# Altium PCB 主控.PcbDoc
Units mm, origin at the board's own origin, x right, y up, seen from the top; angles counter-clockwise.
Board outline 95.27 x 80.77 mm, 4 copper layers (Top Layer, GND, PWR, Bottom Layer), stack 0.603 mm thick; 23 components, 70 nets, 268 pads, 8 vias.
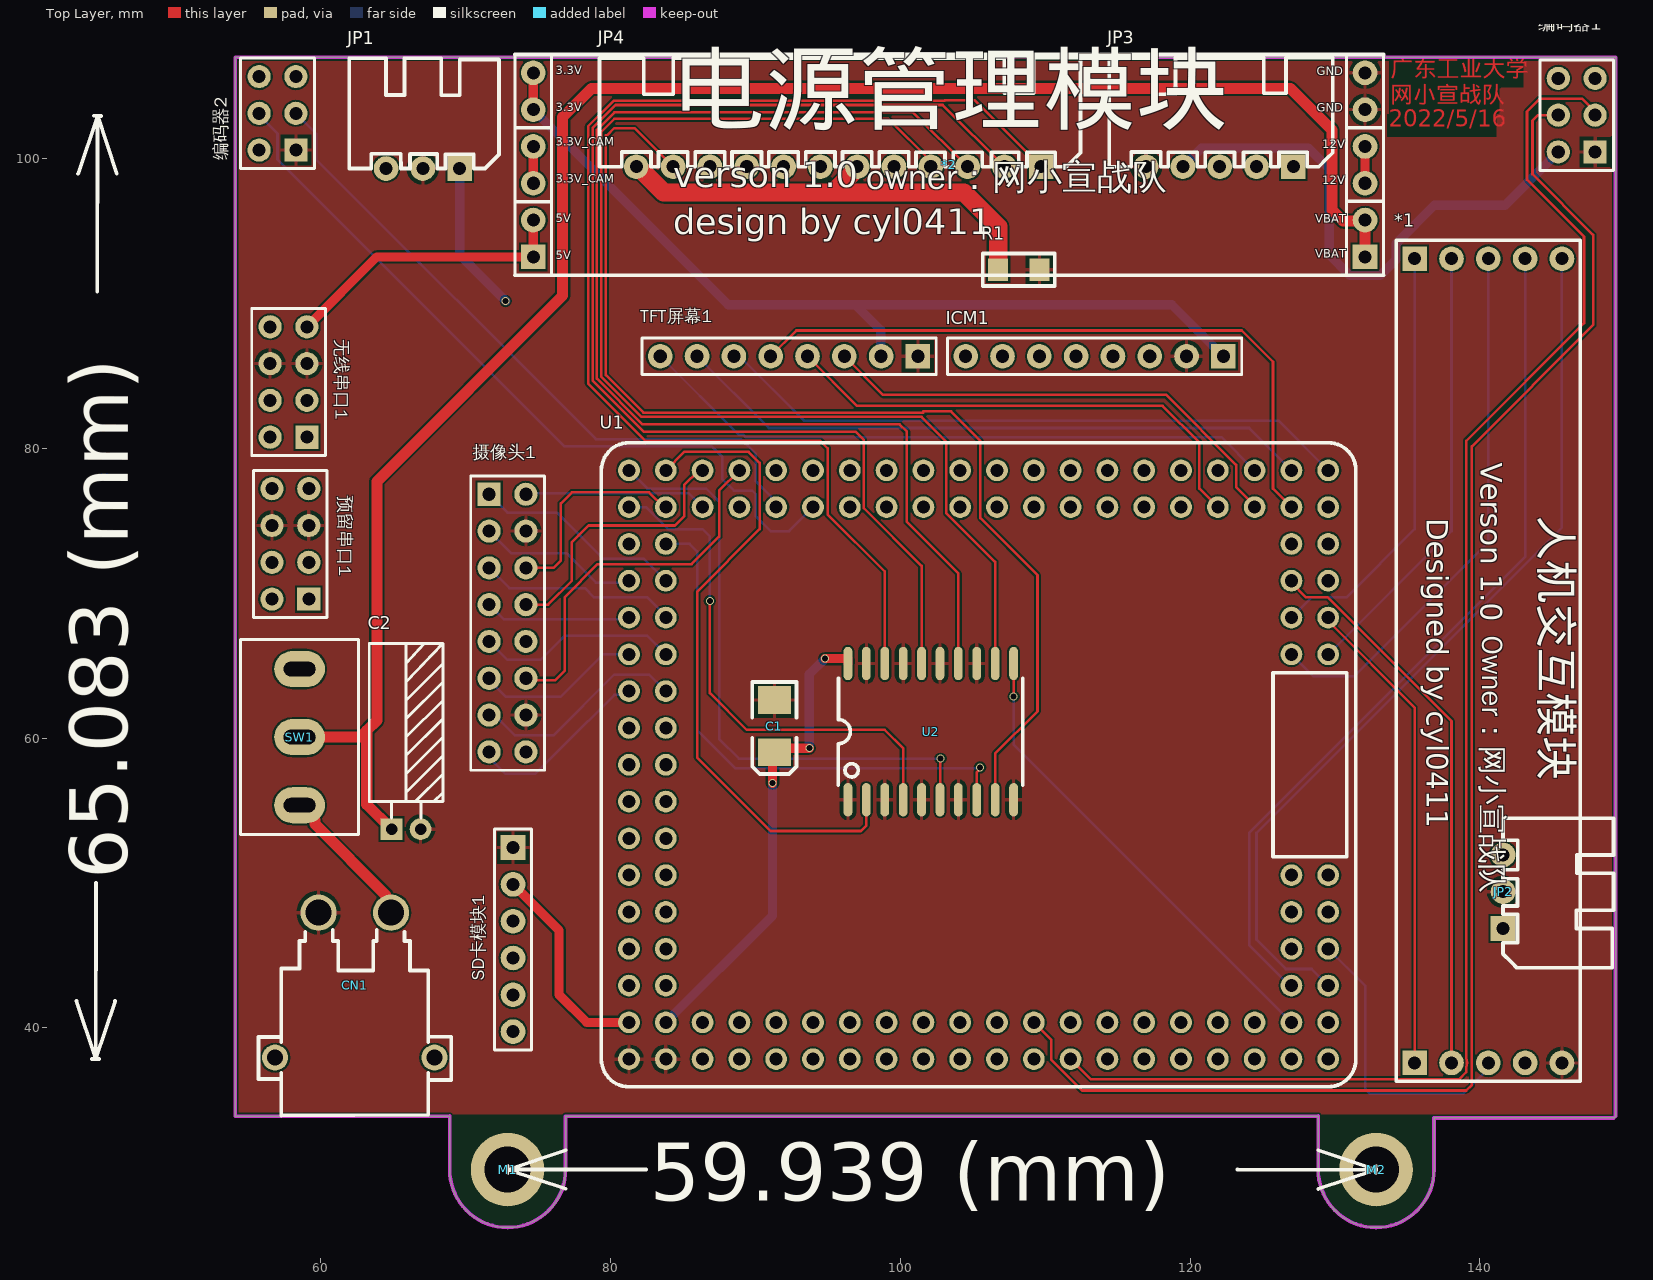
[diagram p0: Top Layer view]
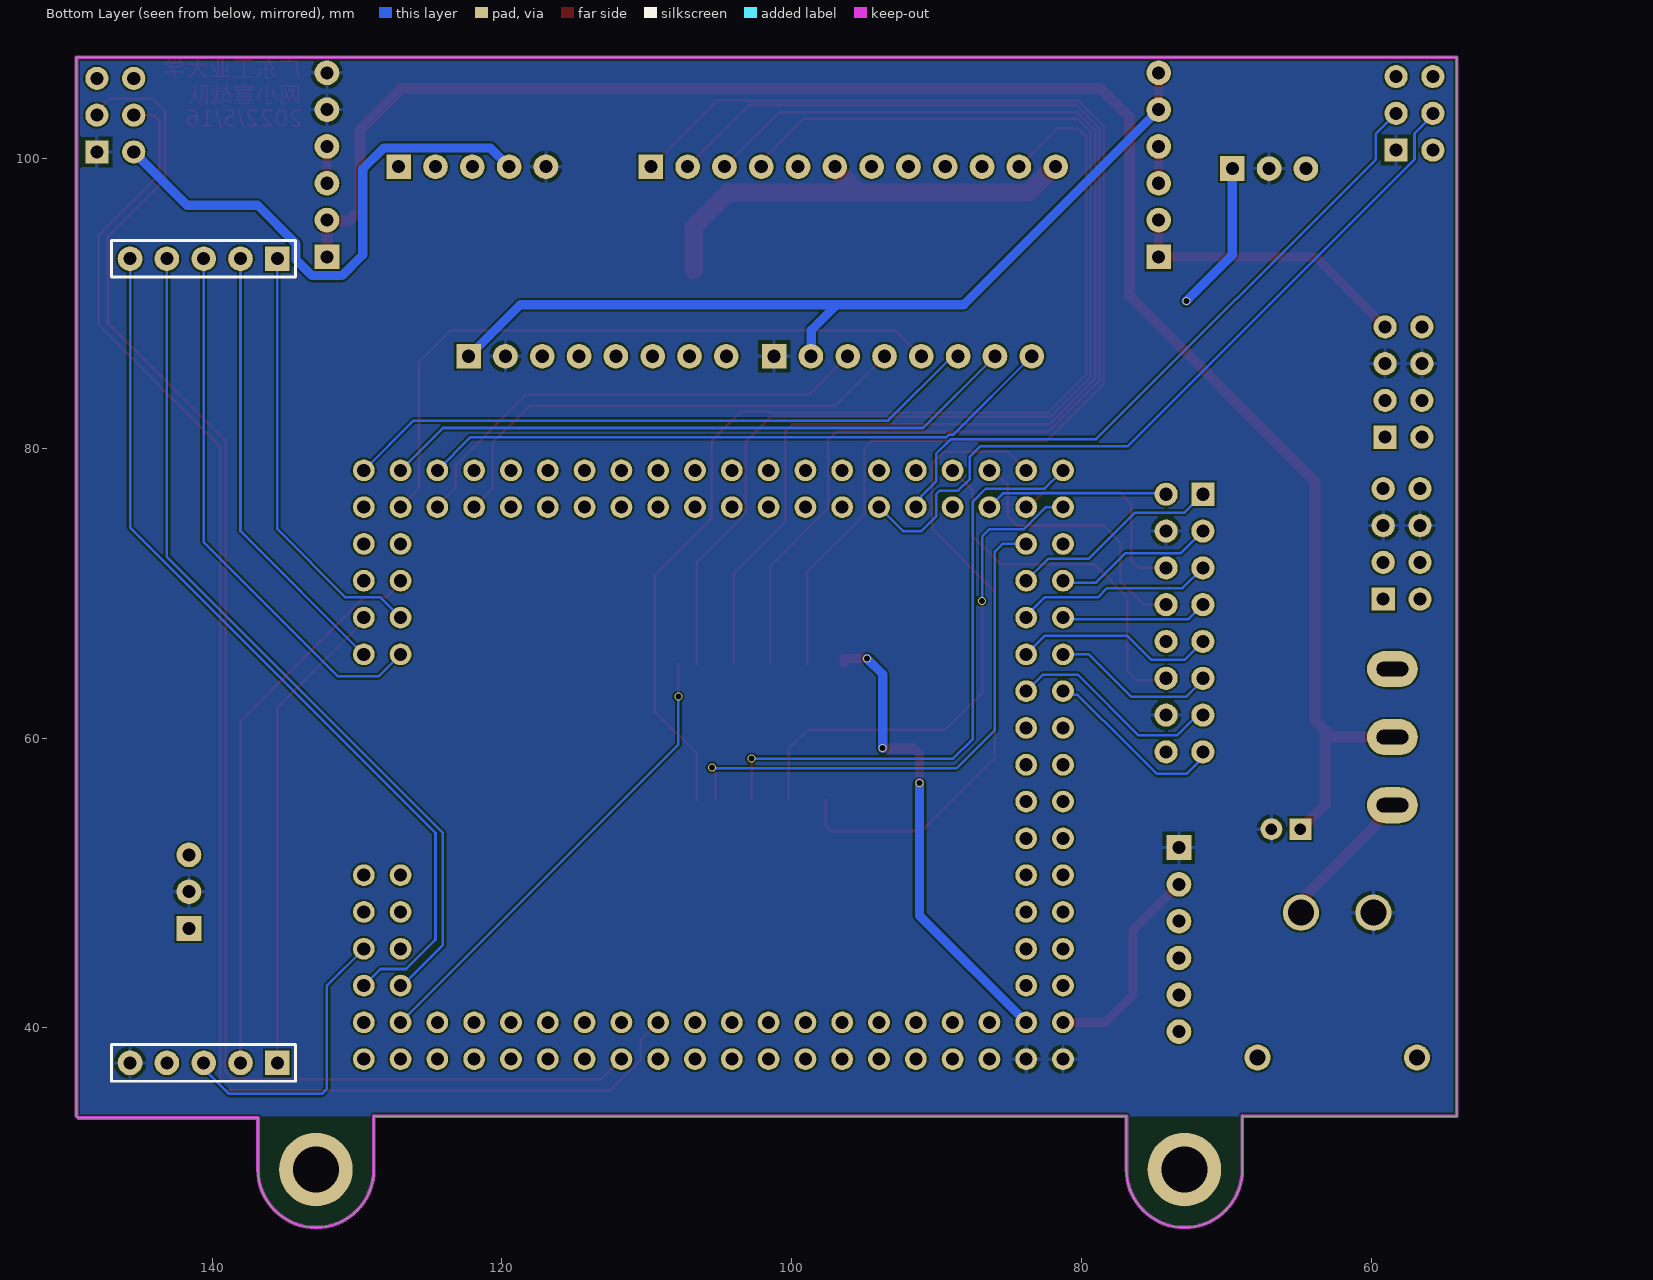
[diagram p1: Bottom Layer view, seen from below]
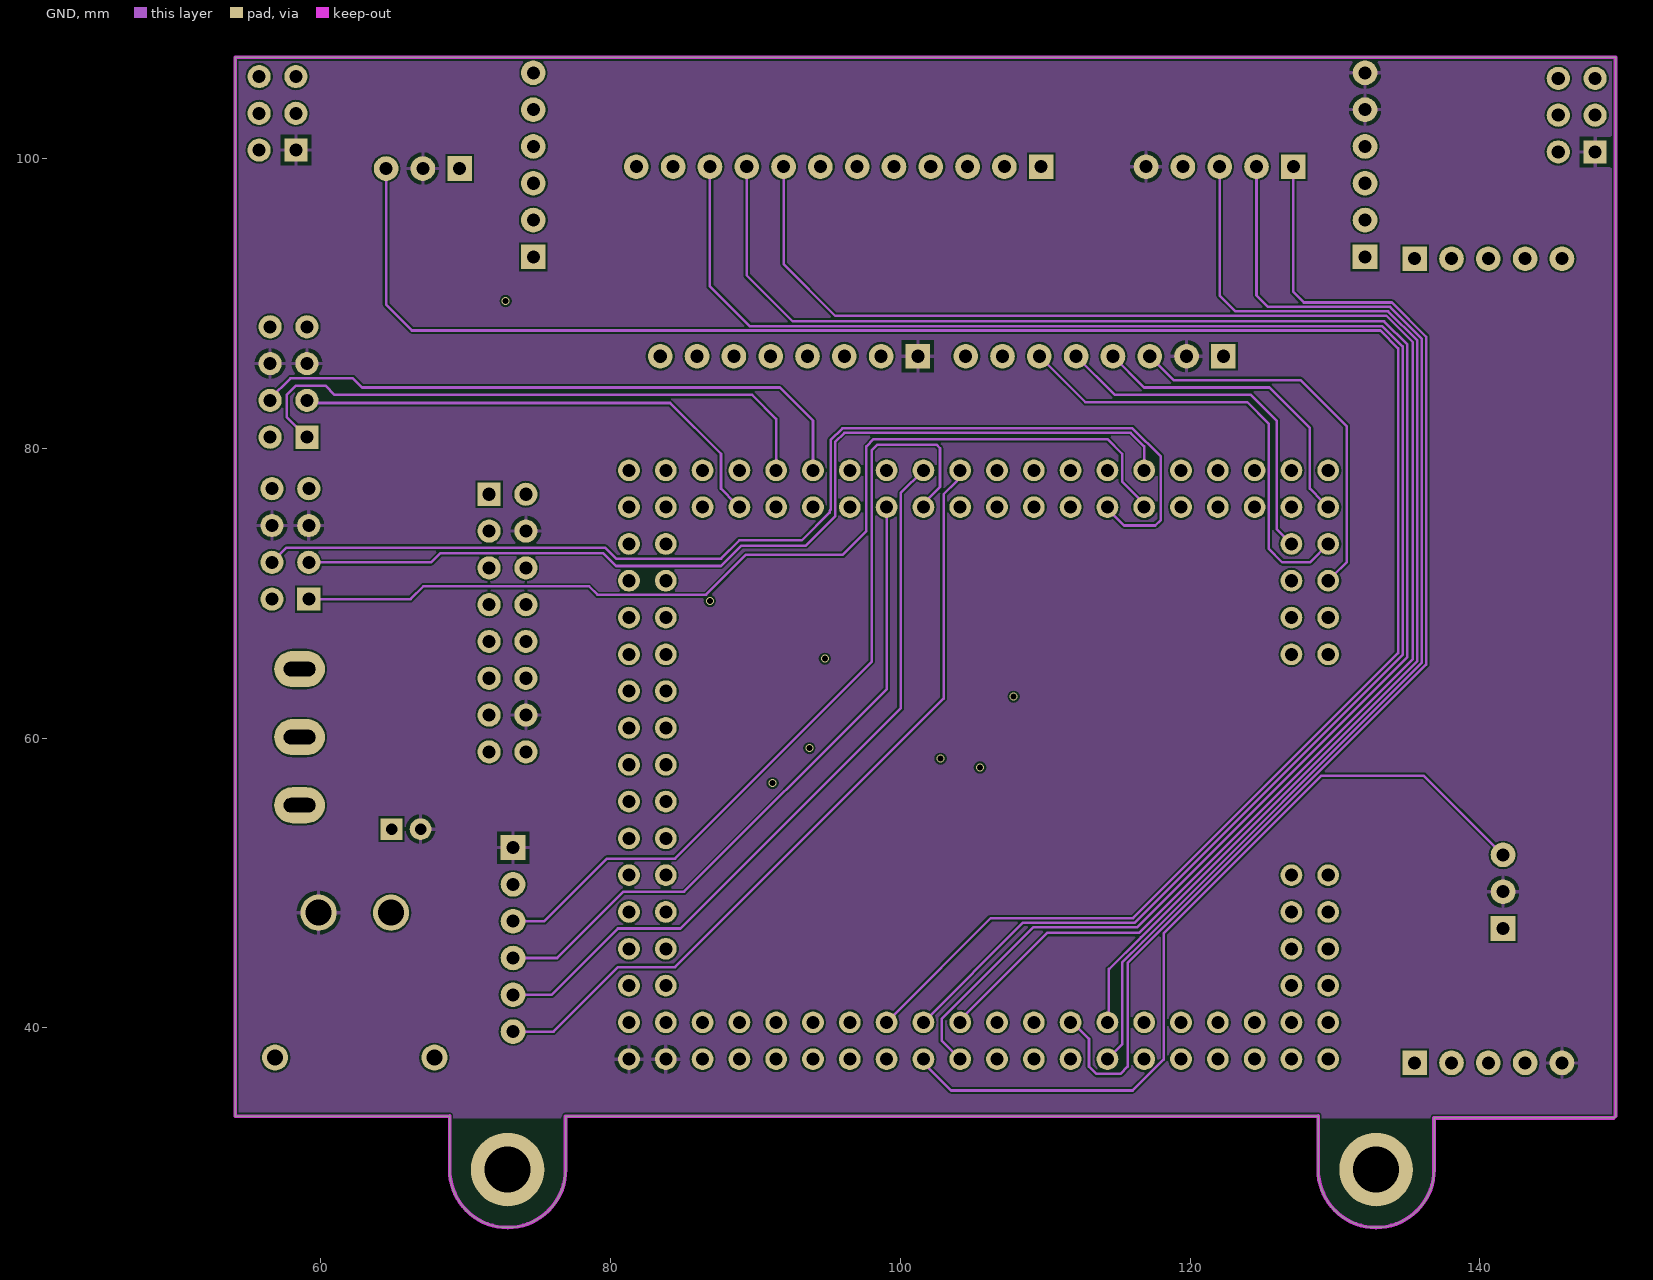
[diagram p2: GND]
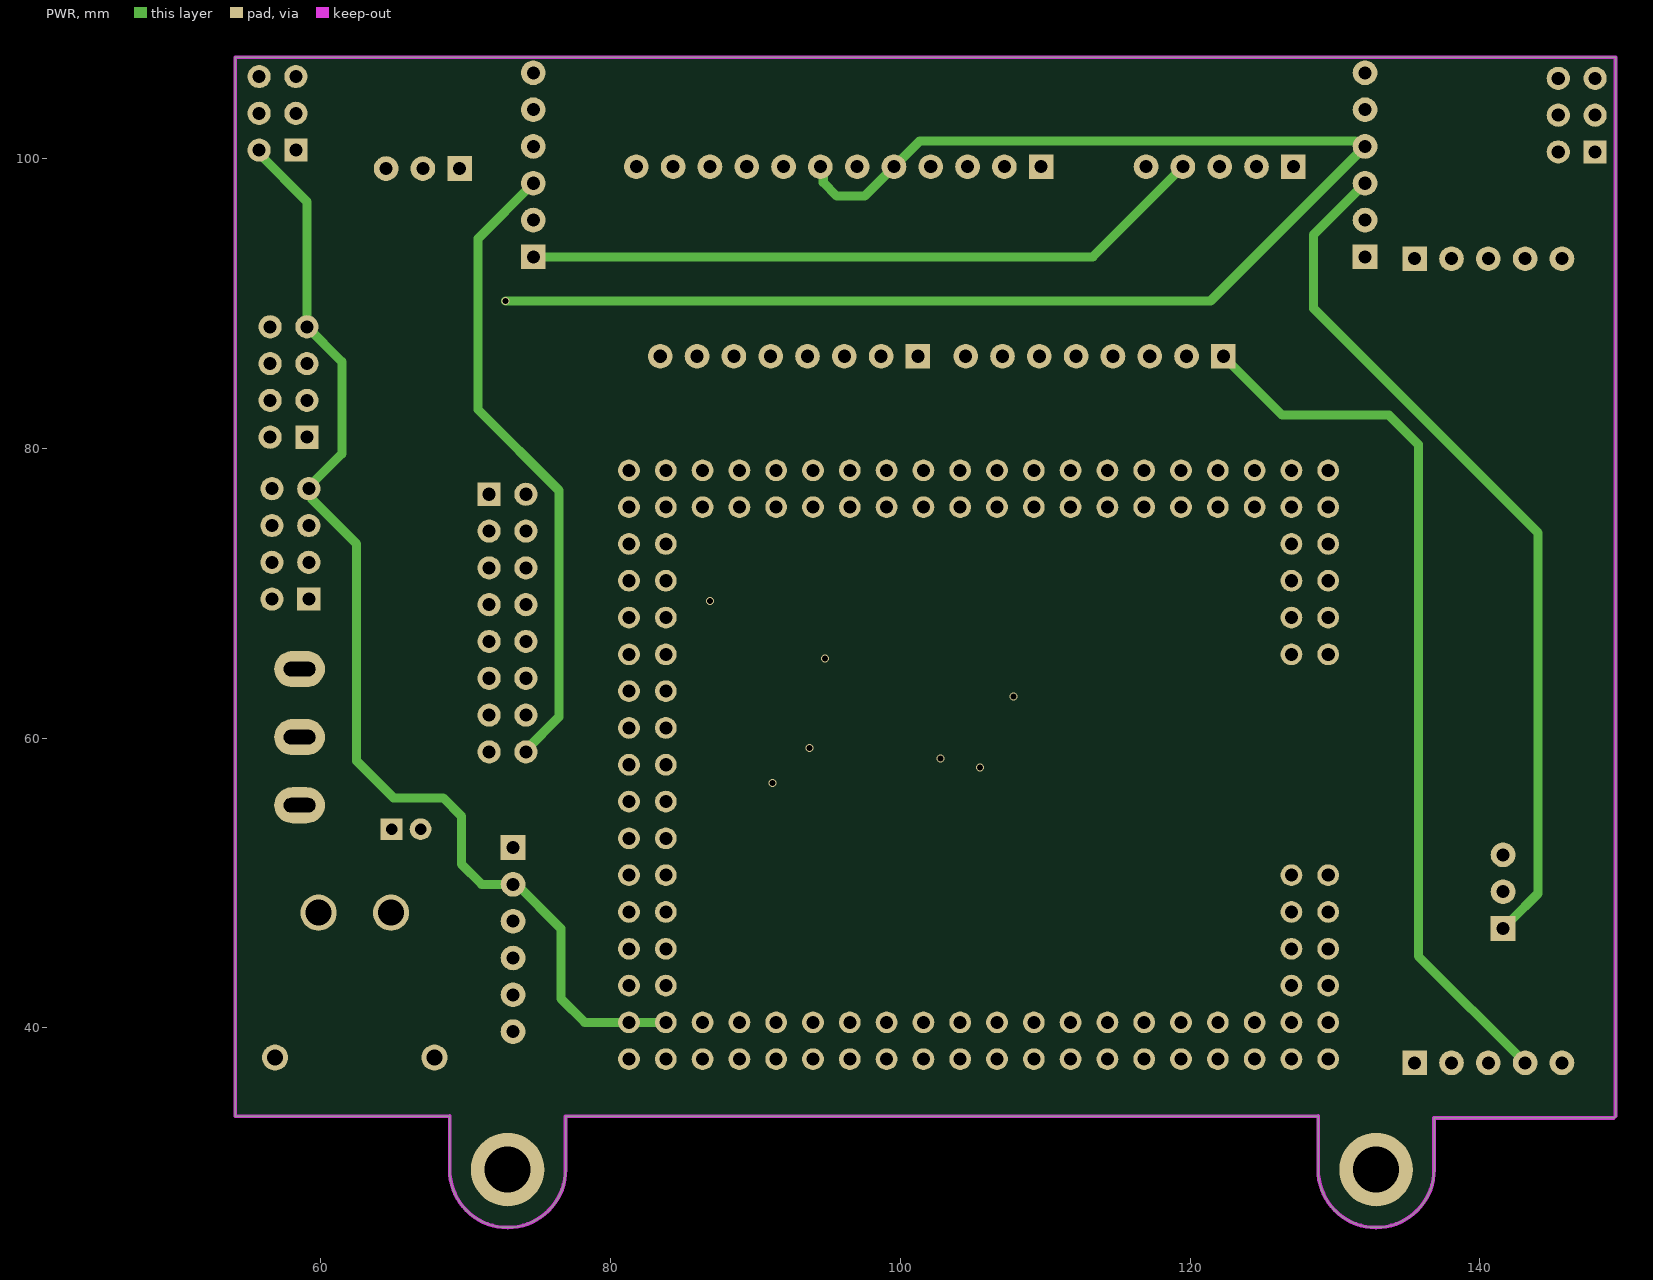
[diagram p3: PWR]

## Layer stack, top to bottom
Top Solder: solder mask 0.0102, Solder Resist, Dk 3.5
Top Layer: signal copper 0.0356
Dielectric 2: prepreg 0.0711, PP-006, Dk 4.1
GND: signal copper 0.035
Dielectric 1: dielectric 0.32, FR-4, Dk 4.8
PWR: signal copper 0.035
Dielectric 3: prepreg 0.0711, PP-006, Dk 4.1
Bottom Layer: signal copper 0.0356
Bottom Solder: solder mask 0.0102, Solder Resist, Dk 3.5

## Board outline
54.102,33.909 54.102,34.303 54.102,106.992 149.369,106.992 149.369,33.909 149.252,33.792 136.842,33.792 136.842,30.226 cw(c132.842,30.226) 128.842,30.226 128.842,33.909 76.903,33.909 76.903,30.227 cw(c72.903,30.227) 68.903,30.227 68.903,33.922 68.89,33.909

## Design rules (kind name [scope] priority, off if disabled: settings)
Clearance [All] p1: gap=0.127 ignorepadtopadclearanceinfootprint=TRUE
ComponentClearance [All] p1: gap=0.254 collisioncheckmode=3 verticalgap=2540 showdistances=FALSE donotcheckwithout3dbody=TRUE
Height [All] p1: minheight=0 maxheight=999 prefheight=12.7
PolygonConnect [All] p1: connectstyle=Relief reliefconductorwidth=0.254 reliefentries=4 polygonreliefangle="90 Angle" airgapwidth=0.254
RoutingVias [All] p1: holewidth=4 width=4 viastyle="Through Hole" minholewidth=0.45 minwidth=0.5 maxholewidth=0.711 maxwidth=1.27
SilkToSilkClearance [All] p1: silktosilkclearance=0
SilkToSolderMaskClearance [IsPad] p1: minsilkscreentomaskgap=0 clearancetoexposedcopper=FALSE
SolderMaskExpansion [All] p1: expansion=0.102 istentingtop=FALSE
UnRoutedNet [All] p1: checkbadconnections=TRUE
Width [InNetClass('SIGNAL')] p1: maxlimit=5 minlimit=0.127 preferedwidth=0.178
25 further rules are at their usual default settings.

## Classes and differential pairs
component class 主控: U1

## Components (designator, comment, footprint, x,y, rotation, side; value= is the part's Value field where it differs from the comment)
*1 "人机交互模块" PCBComponent_1#1 141.097,66.421 r270 top
*2 "电源管理模块" PCBComponent_1#2 113.665,99.949 r0 top
C1 "C-CD" "CD B(3528)" 91.313,60.833 r90 top value=10uF
C2 "C-CAP" "CAP 2.0*5*11-H - GD" 65.897,53.721 r0 top value=100uF
CN1 "XT30PW-M" CONN-TH_XT30PW-M 62.357,41.529 r0 top
ICM1 "HDR-1X8" HDR2.54-M-LI-8P 113.411,86.36 r180 top
JP1 "HDR-1X3" XH2.54-WI-3P 67.056,99.314 r180 top
JP2 "HDR-1X3" XH2.54-WI-3P 141.605,49.403 r90 top
JP3 "HDR-1X5" XH2.54-WI-5P 122.047,99.441 r180 top
JP4 "HDR-1X12" XH2.54-WI-12P 95.758,99.441 r180 top
M1 "M3" "M3 125X200" 72.903,30.227 r0 top
M2 "M3" "M3 125X200" 132.842,30.226 r0 top
R1 "R" "R 1206_L" 108.204,92.329 r180 top value=0
SD卡模块1 "HDR-1X6" HDR2.54-M-LI-6P 73.279,46.101 r270 top
SW1 "MTS-10x" MTS-10x 58.547,60.072 r270 top
TFT屏幕1 "HDR-1X8" HDR2.54-M-LI-8P 92.329,86.36 r180 top
U1 "TC364_CoreBoard" TC364_CoreBoard 81.28,37.846 r90 top locked
U2 "SN74HC244DWRG4" SOIC-20_L12.8-W7.5-P1.27-LS10.3-BL 102.089,60.451 r0 top
摄像头1 "Header 8X2" HDR2.54-LI-2x8P 72.898,67.945 r270 top
无线串口1 "Header 4X2" HDR2.54-LI-2x4P 57.785,84.582 r90 top
编码器1 "Header3X2" HDR2.54-LI-2x3P 146.685,102.997 r90 top
编码器2 "Header3X2" HDR2.54-LI-2x3P 57.023,103.124 r90 top
预留串口1 "Header 4X2" HDR2.54-LI-2x4P 57.912,73.406 r90 top

## Footprints (in the part's own frame and the unit in brackets; to place one, negate y for a bottom-side part, rotate by r counter-clockwise, add the part's x,y. Pads: shape width x height; smd on the part's side, far side on the other; paste and mask are expansions set on the pad)
"CAP 2.0*5*11-H - GD" [mm] "脚距2mm直径5mm高度11mm"
  rect 1.5x1.5 hole 0.8: 1(-1,0)
  round 1.5 hole 0.8: 2(1,0)
  silkscreen extent -2.54,0.76 2.55,12.83, body extent -2.5,-0.25 2.51,12.96, height 5.02
"CD B(3528)" [mil] "长3.5mm，宽2.8mm，厚1.9mm"
  rect 75x90 smd: 1(-70.87,-0.01) 2(70.86,-0.01)
  silkscreen extent -130,-60 120,60, body extent -69,-55 69,55, height 75
CONN-TH_XT30PW-M [mm]
  round 2.5 hole 1.8: 1(-2.5,6.427) 2(2.5,6.427)
  round 1.8 hole 1.1: 3(5.5,-3.574) 4(-5.5,-3.574)
  silkscreen extent -6.65,-7.57 6.65,5.24
HDR2.54-LI-2x3P [mm] "双排排针，3x2脚"
  rect 1.6x1.6 hole 0.9: 1(-2.54,-1.27)
  round 1.6 hole 0.9: 2(-2.54,1.27) 3(0,-1.27) 4(0,1.27) 5(2.54,-1.27) 6(2.54,1.27)
  silkscreen extent -3.81,-2.54 3.81,2.54, body extent -3.81,-2.54 3.81,2.54, height 8.5
HDR2.54-LI-2x4P [mm] "双排排针，4x2脚"
  rect 1.6x1.6 hole 0.9: 1(-3.81,-1.27)
  round 1.6 hole 0.9: 2(-3.81,1.27) 3(-1.27,-1.27) 4(-1.27,1.27) 5(1.27,-1.27) 6(1.27,1.27) 7(3.81,-1.27) 8(3.81,1.27)
  silkscreen extent -5.08,-2.54 5.08,2.54, body extent -5.08,-2.54 5.08,2.54, height 8.5
HDR2.54-LI-2x8P [mm] "双排排针，8x2脚"
  rect 1.6x1.6 hole 0.9: 1(-8.89,-1.27)
  round 1.6 hole 0.9: 2(-8.89,1.27) 3(-6.35,-1.27) 4(-6.35,1.27) 5(-3.81,-1.27) 6(-3.81,1.27) 7(-1.27,-1.27) 8(-1.27,1.27) 9(1.27,-1.27) 10(1.27,1.27) 11(3.81,-1.27) 12(3.81,1.27) 13(6.35,-1.27) 14(6.35,1.27) 15(8.89,-1.27) 16(8.89,1.27)
  silkscreen extent -10.16,-2.54 10.16,2.54, body extent -10.16,-2.54 10.16,2.54, height 8.5
HDR2.54-M-LI-6P [mm] "排母，6脚"
  rect 1.7x1.7 hole 0.9: 1(-6.35,0)
  round 1.7 hole 0.9: 2(-3.81,0) 3(-1.27,0) 4(1.27,0) 5(3.81,0) 6(6.35,0)
  silkscreen extent -7.62,-1.27 7.62,1.27, body extent -7.62,-1.27 7.62,1.27, height 8.5
HDR2.54-M-LI-8P [mm] "排母，8脚"
  rect 1.7x1.7 hole 0.9: 1(-8.89,0)
  round 1.7 hole 0.9: 2(-6.35,0) 3(-3.81,0) 4(-1.27,0) 5(1.27,0) 6(3.81,0) 7(6.35,0) 8(8.89,0)
  silkscreen extent -10.16,-1.27 10.16,1.27, body extent -10.16,-1.27 10.16,1.27, height 8.5
"M3 125X200" [mm] "M3螺丝孔，孔125Mil，焊盘200Mil"
  round 5.08 hole 3.175: 1(0,0)
MTS-10x [mm] "MTS10系列3脚扭子开关"
  oval 2.5x3.5 hole 1 slot 2.2 at 90 deg unplated: 1(-4.7,0) 2(0,0) 3(4.7,0)
  silkscreen extent -6.73,-4.06 6.73,4.06, body extent -6.6,-3.95 6.6,3.95, height 30.47
PCBComponent_1#1 [mm]
  rect 1.7x1.7 hole 0.9: 1(-26.67,-5.588) 6(28.829,-5.588)
  round 1.7 hole 0.9: 2(-26.67,-3.048) 3(-26.67,-0.508) 4(-26.67,2.032) 5(-26.67,4.572) 7(28.829,-3.048) 8(28.829,-0.508) 9(28.829,2.032) 10(28.829,4.572)
  silkscreen extent -27.94,-6.86 30.1,5.84, body extent -27.94,-6.86 30.1,5.84, height 8.5
PCBComponent_1#2 [mm]
  round 1.7 hole 0.9: 1(-38.989,3.429) 1(-38.989,5.969) 2(-38.989,-1.651) 2(-38.989,0.889) 3(-38.989,-4.191) 4(18.415,-4.191) 5(18.415,-1.651) 5(18.415,0.889) 6(18.415,3.429) 6(18.415,5.969)
  rect 1.7x1.7 hole 0.9: 3(-38.989,-6.731) 4(18.415,-6.731)
  silkscreen extent -40.26,-8 19.68,7.24, body extent -40.26,-8 19.68,7.24, height 8.5
"R 1206_L" [mil] "1/4W贴片电阻"
  rect 55x62 smd: 1(-55.12,0) 2(57.09,0)
  silkscreen extent -96,-44 98,44, body extent -63,-31 63,32, height 22
SOIC-20_L12.8-W7.5-P1.27-LS10.3-BL [mm]
  oval 0.6x2.3 smd: 1(-5.696,-4.7) 2(-4.426,-4.7) 3(-3.156,-4.7) 4(-1.886,-4.7) 5(-0.616,-4.7) 6(0.654,-4.7) 7(1.924,-4.7) 8(3.194,-4.7) 9(4.464,-4.7) 10(5.734,-4.7) 11(5.734,4.7) 12(4.464,4.7) 13(3.194,4.7) 14(1.924,4.7) 15(0.654,4.7) 16(-0.616,4.7) 17(-1.886,4.7) 18(-3.156,4.7) 19(-4.426,4.7) 20(-5.696,4.7)
  silkscreen extent -6.37,-3.68 6.37,3.68
TC364_CoreBoard [mm] "逐飞科技TC364核心板"
  round 1.5 hole 0.9: 1(0,0) 2(2.54,0) 3(0,-2.54) 4(2.54,-2.54) 5(0,-5.08) 6(2.54,-5.08) 7(0,-7.62) 8(2.54,-7.62) 9(0,-10.16) 10(2.54,-10.16) 11(0,-12.7) 12(2.54,-12.7) 13(0,-15.24) 14(2.54,-15.24) 15(0,-17.78) 16(2.54,-17.78) 17(0,-20.32) 18(2.54,-20.32) 19(0,-22.86) 20(2.54,-22.86) 21(0,-25.4) 22(2.54,-25.4) 23(0,-27.94) 24(2.54,-27.94) 25(0,-30.48) 26(2.54,-30.48) 27(0,-33.02) 28(2.54,-33.02) 29(0,-35.56) 30(2.54,-35.56) 31(0,-38.1) 32(2.54,-38.1) 33(0,-40.64) 34(2.54,-40.64) 35(0,-43.18) 36(2.54,-43.18) 37(0,-45.72) 38(2.54,-45.72) 39(0,-48.26) 40(2.54,-48.26) 41(5.08,-48.26) 42(5.08,-45.72) 43(7.62,-48.26) 44(7.62,-45.72) 45(10.16,-48.26) 46(10.16,-45.72) 47(12.7,-48.26) 48(12.7,-45.72) 49(27.94,-45.72) 50(27.94,-48.26) 51(30.48,-45.72) 52(30.48,-48.26) 53(33.02,-45.72) 54(33.02,-48.26) 55(35.56,-45.72) 56(35.56,-48.26) 57(38.1,-48.26) 58(40.64,-48.26) 59(38.1,-45.72) 60(40.64,-45.72) 61(38.1,-43.18) 62(40.64,-43.18) 63(38.1,-40.64) 64(40.64,-40.64) 65(38.1,-38.1) 66(40.64,-38.1) 67(38.1,-35.56) 68(40.64,-35.56) 69(38.1,-33.02) 70(40.64,-33.02) 71(38.1,-30.48) 72(40.64,-30.48) 73(38.1,-27.94) 74(40.64,-27.94) 75(38.1,-25.4) 76(40.64,-25.4) 77(38.1,-22.86) 78(40.64,-22.86) 79(38.1,-20.32) 80(40.64,-20.32) 81(38.1,-17.78) 82(40.64,-17.78) 83(38.1,-15.24) 84(40.64,-15.24) 85(38.1,-12.7) 86(40.64,-12.7) 87(38.1,-10.16) 88(40.64,-10.16) 89(38.1,-7.62) 90(40.64,-7.62) 91(38.1,-5.08) 92(40.64,-5.08) 93(38.1,-2.54) 94(40.64,-2.54) 95(38.1,0) 96(40.64,0) 97(35.56,-2.54) 98(35.56,0) 99(33.02,-2.54) 100(33.02,0) 101(30.48,-2.54) 102(30.48,0) 103(27.94,-2.54) 104(27.94,0) 105(25.4,-2.54) 106(25.4,0) 107(22.86,-2.54) 108(22.86,0) 109(20.32,-2.54) 110(20.32,0) 111(17.78,-2.54) 112(17.78,0) 113(15.24,-2.54) 114(15.24,0) 115(12.7,-2.54) 116(12.7,0) 117(10.16,-2.54) 118(10.16,0) 119(7.62,-2.54) 120(7.62,0) 121(5.08,-2.54) 122(5.08,0)
  silkscreen extent -1.91,-50.16 42.55,1.91
XH2.54-WI-3P [mm] "接插件，3P"
  rect 1.7x1.7 hole 0.9: 1(-2.54,0)
  round 1.7 hole 0.9: 2(0,0) 3(2.54,0)
  silkscreen extent -5.26,-7.62 5.08,0, body extent -5.04,-7.35 5.04,0.35, height 5.73
XH2.54-WI-5P [mm] "接插件，5P"
  rect 1.7x1.7 hole 0.9: 1(-5.08,0)
  round 1.7 hole 0.9: 2(-2.54,0) 3(0,0) 4(2.54,0) 5(5.08,0)
  silkscreen extent -7.8,-7.53 7.62,0, body extent -7.58,-7.35 7.58,0.35, height 5.73
XH2.54-WI-12P [mm] "接插件，12P"
  rect 1.7x1.7 hole 0.9: 1(-13.97,0)
  round 1.7 hole 0.9: 2(-11.43,0) 3(-8.89,0) 4(-6.35,0) 5(-3.81,0) 6(-1.27,0) 7(1.27,0) 8(3.81,0) 9(6.35,0) 10(8.89,0) 11(11.43,0) 12(13.97,0)
  silkscreen extent -16.69,-7.53 16.51,0, body extent -16.47,-7.35 16.47,0.35, height 5.75

## Part data
C1: "贴片钽电容", 版权归属=电协硬件组
C2: "直插电解电容", 版权归属=电协硬件组
ICM1 TFT屏幕1: library part "Header 8", "8P接插件", BOM名称=8P接插件, 学习资源=www.ooocke.com, 版权归属=源创客
JP1 JP2: library part "Header 3", "3P接插件", BOM名称=3P接插件, 学习资源=www.ooocke.com, 版权归属=源创客
JP3: library part "Header 5", "5P接插件", BOM名称=5P接插件, 学习资源=www.ooocke.com, 版权归属=源创客
JP4: library part "Header 12", "12P接插件", BOM名称=12P接插件, 学习资源=www.ooocke.com, 版权归属=源创客
M1 M2: "铜柱孔", 版权归属=电协硬件组
R1: "贴片电阻", 版权归属=电协硬件组
SD卡模块1: library part "Header 6", "6P接插件", BOM名称=6P接插件, 学习资源=www.ooocke.com, 版权归属=源创客
SW1: "MTS10x系列3脚扭子开关", 版权归属=电协硬件组
U1: "逐飞科技TC364核心板"
摄像头1: "8*2P接插件", BOM名称=8*2P接插件, 学习资源=www.ooocke.com, 版权归属=源创客
无线串口1 预留串口1: "4*2P接插件", BOM名称=4*2P接插件, 学习资源=www.ooocke.com, 版权归属=源创客
编码器1 编码器2: library part "Header 3X2", "3*2P接插件", BOM名称=3*2P接插件, 学习资源=www.ooocke.com, 版权归属=源创客

## Via types
v1: diameter 0.559, hole 0.406, Top Layer to Bottom Layer, 8 vias

## Nets (pads, with @x,y where several pads share a name; then routed paths per layer and width w, separated by ;. In a path a pad name is that pad's centre, name@x,y a point inside that pad or via, vN(x,y) a via of type N, cw(c..) or ccw(c..) an arc to the next point about the centre after c; other vN are vias at no path point)
0_00: U1.99 摄像头1.1 | length 14.7
  Bottom Layer w0.178: 摄像头1.1 72.898,75.565 76.327,75.565 79.502,72.39 82.296,72.39 U1.99
0_01: U1.100 摄像头1.3 | length 11.2
  Bottom Layer w0.178: 摄像头1.3 73.152,72.771 76.962,72.771 78.994,70.739 81.153,70.739 U1.100
0_02: U1.101 摄像头1.5 | length 13.6
  Bottom Layer w0.178: 摄像头1.5 73.025,70.358 78.232,70.358 78.867,69.723 82.55,69.723 U1.101@83.883,68.389
0_03: U1.102 摄像头1.7 | length 10.1
  Bottom Layer w0.178: 摄像头1.7 72.644,68.199 81.153,68.199 U1.102
0_04: U1.103 摄像头1.9 | length 13.9
  Bottom Layer w0.178: 摄像头1.9 72.898,65.405 75.184,65.405 76.835,67.056 82.55,67.056 U1.103
0_05: U1.104 摄像头1.11 | length 11.5
  Bottom Layer w0.178: 摄像头1.11 71.628,64.008 72.771,62.865 76.581,62.865 79.502,65.786 U1.104
0_06: U1.105 摄像头1.13 | length 15
  Bottom Layer w0.178: 摄像头1.13 72.009,61.595 73.406,60.198 76.073,60.198 80.264,64.389 82.677,64.389 U1.105
0_07: U1.106 摄像头1.15 | length 12.9
  Bottom Layer w0.178: 摄像头1.15 71.628,58.674 72.771,57.531 74.803,57.531 76.708,59.436 80.265,62.993 81.027,62.993 U1.106
02_0: U1.90 摄像头1.12 | length 25.6
  Top Layer w0.178: 摄像头1.12 74.295,64.008 76.2,64.008 76.835,64.643 76.835,69.723 79.121,72.009 85.598,72.009 87.503,73.914 87.503,77.089 U1.90
02_1: U1.91 摄像头1.2 | length 12.6
  Bottom Layer w0.178: 摄像头1.2 74.245,76.912 85.394,76.912 U1.91
02_2: U1.92 摄像头1.8 | length 18.9
  Top Layer w0.178: 摄像头1.8 75.692,69.215 77.343,70.866 77.343,73.533 78.486,74.676 84.455,74.676 85.09,75.311 85.09,77.47 86.106,78.486 U1.92
02_3: U1.93 摄像头1.6 | length 14.5
  Top Layer w0.178: 摄像头1.6 76.073,71.755 76.581,72.263 76.581,76.2 77.343,76.962 82.677,76.962 83.693,75.946 U1.93
02_4: U1.94 U2.2 | length 45.1
  Top Layer w0.178: U1.94 85.09,79.756 89.535,79.756 90.297,78.994 90.297,74.422 85.979,70.104 85.979,58.674 91.059,53.594 97.282,53.594 97.663,53.975 U2.2
02_5: U1.95 U2.4 | length 35.7
  Top Layer w0.178: v1(86.868,69.469) 86.868,63.119 89.408,60.579 98.933,60.579 100.203,59.309 U2.4
  Bottom Layer w0.178: U1.95 82.454,75.946 83.978,74.422 86.36,74.422 86.868,73.914 v1(86.868,69.469)
02_6: U1.96 U2.6 | length 42.2
  Top Layer w0.178: U2.6 102.763,55.771 102.763,58.567 v1(102.783,58.587)
  Bottom Layer w0.178: U1.96 82.549,77.217 86.613,77.217 87.503,76.327 87.503,59.944 88.86,58.587 v1(102.783,58.587)
02_7: U1.97 U2.8 | length 37.7
  Top Layer w0.178: U2.8 105.283,57.651 105.506,57.874 v1(105.506,57.977)
  Bottom Layer w0.178: U1.97 85.471,73.406 85.979,72.898 85.979,60.579 88.646,57.912 105.441,57.912 v1(105.506,57.977)
10_1: U1.85 编码器2.4 | length 53.8
  Bottom Layer w0.178: 编码器2.4 55.753,102.997 57.023,101.727 57.023,99.949 76.835,80.137 86.995,80.137 87.705,79.427 87.705,77.903 88.519,77.089 89.789,77.089 90.043,76.835 90.043,75.311 91.059,74.295 92.329,74.295 U1.85
10_2: U1.86 无线串口1.4 | length 42.8
  GND w0.178: 无线串口1.4 56.515,83.439 57.912,84.836 62.23,84.836 62.865,84.201 91.694,84.201 93.98,81.915 U1.86
10_3: U1.87 编码器2.3 | length 46.8
  Bottom Layer w0.178: 编码器2.3 59.69,101.727 59.69,99.949 78.994,80.645 89.027,80.645 90.043,79.629 90.043,77.724 91.089,76.678 91.089,76.654 91.44,76.304 U1.87
10_5: U1.88 无线串口1.1 | length 42
  GND w0.178: 无线串口1.1 57.658,82.169 57.658,83.693 58.293,84.328 60.325,84.328 60.96,83.693 89.789,83.693 91.44,82.042 U1.88
10_6: U1.89 无线串口1.3 | length 34.2
  GND w0.178: 无线串口1.3 59.233,83.134 84.125,83.134 87.63,79.629 87.63,77.216 88.646,76.2 U1.89@88.646,75.946
11_2: SD卡模块1.6 U1.78 | length 55.5
  GND w0.178: SD卡模块1.6 76.073,39.751 80.518,44.196 84.455,44.196 102.997,62.738 102.997,76.835 103.887,77.725 103.887,78.233 U1.78
11_3: SD卡模块1.3 U1.79 | length 56.3
  GND w0.178: SD卡模块1.3 75.438,47.371 79.756,51.689 84.455,51.689 98.044,65.278 98.044,79.883 98.425,80.264 102.489,80.264 102.743,80.01 102.743,77.343 101.6,76.2 U1.79
11_6: SD卡模块1.5 U1.80 | length 52
  GND w0.178: SD卡模块1.5 75.946,42.291 80.518,46.863 84.836,46.863 100.026,62.053 100.026,76.912 U1.80
11_9: SD卡模块1.4 U1.81 | length 46
  GND w0.178: SD卡模块1.4 76.327,44.831 80.899,49.403 85.09,49.403 99.06,63.373 U1.81
14_0: U1.67 预留串口1.1 | length 68.6
  GND w0.178: 预留串口1.1@59.944,69.596 66.205,69.596 67.094,70.485 78.521,70.485 79.105,69.9 86.599,69.9 89.368,72.669 96.037,72.669 97.663,74.295 97.663,80.137 98.171,80.645 114.3,80.645 115.316,79.629 115.316,77.724 116.84,76.2 U1.67
14_1: U1.68 预留串口1.3 | length 67.1
  GND w0.178: 预留串口1.3 67.629,72.136 68.264,72.771 79.502,72.771 80.391,71.882 87.63,71.882 89.027,73.279 93.472,73.279 95.504,75.311 95.504,80.441 96.14,81.077 115.9,81.077 116.84,80.137 U1.68
14_2: U1.69 预留串口1.4 | length 78.3
  GND w0.178: 预留串口1.4 57.658,73.152 79.629,73.152 80.391,72.39 87.63,72.39 88.9,73.66 93.218,73.66 95.123,75.565 95.123,75.692 95.199,75.768 95.199,80.567 96.013,81.382 116.026,81.382 117.983,79.425 117.983,75.057 117.602,74.676 115.443,74.676 114.3,75.819 U1.69
15_0: TFT屏幕1.6 U1.58 | length 44.3
  Bottom Layer w0.178: TFT屏幕1.6 88.9,86.36 93.345,81.915 126.111,81.915 U1.58
15_1: TFT屏幕1.5 U1.59 | length 46.9
  Top Layer w0.178: TFT屏幕1.5 92.837,88.138 123.571,88.138 125.73,85.979 125.73,77.216 U1.59
15_2: TFT屏幕1.7 U1.60 | length 44.3
  Bottom Layer w0.178: TFT屏幕1.7 90.932,81.407 124.079,81.407 U1.60
15_3: TFT屏幕1.3 U1.61 | length 33.6
  Top Layer w0.178: TFT屏幕1.3 98.806,83.693 118.364,83.693 123.19,78.867 123.19,77.343 124.46,76.073 U1.61
15_4: TFT屏幕1.8 U1.62 | length 44.3
  Bottom Layer w0.178: TFT屏幕1.8 88.849,80.95 89.153,80.95 89.331,80.772 122.174,80.772 U1.62
15_5: TFT屏幕1.4 U1.63 | length 34.5
  Top Layer w0.178: TFT屏幕1.4 97.028,82.931 118.11,82.931 120.65,80.391 120.65,77.216 U1.63
20_11: ICM1.3 U1.54 | length 25.7
  GND w0.178: ICM1.3@117.665,85.915 118.872,84.709 127.635,84.709 130.81,81.534 130.81,72.136 129.921,71.247 U1.54@129.921,71.12
20_12: ICM1.5 U1.55 | length 24.6
  GND w0.178: ICM1.5 114.808,83.693 124.206,83.693 125.984,81.915 125.984,74.422 U1.55
20_13: ICM1.6 U1.56 | length 31.4
  GND w0.178: ICM1.6 112.776,83.185 123.952,83.185 125.426,81.711 125.426,73.075 126.365,72.136 128.27,72.136 U1.56
20_14: ICM1.4 U1.57 | length 21.5
  GND w0.178: ICM1.4 116.84,84.201 125.476,84.201 128.27,81.407 128.27,77.216 129.159,76.327 U1.57@129.159,75.946
21_2: U1.38 U2.11 | length 32.7
  Top Layer w0.178: v1(107.823,62.865) U2.11
  Bottom Layer w0.178: v1(107.823,62.865) 107.823,59.563 U1.38
33_6: U1.24 编码器1.4 | length 106.8
  Top Layer w0.178: U1.24 110.416,39.19 110.416,37.824 112.553,35.687 139.065,35.687 139.446,36.068 139.446,80.137 147.828,88.519 147.828,94.742 143.637,98.933 143.637,102.616 144.018,102.997 编码器1.4
33_7: U1.25 编码器1.3 | length 104.5
  Top Layer w0.178: U1.25 113.157,36.449 138.557,36.449 139.065,36.957 139.065,37.243 139.065,37.27 ccw(c138.049,37.592) 139.065,37.914 139.065,80.518 147.193,88.646 147.193,94.615 143.256,98.552 143.256,103.251 144.145,104.14 147.066,104.14 编码器1.3@147.701,103.505
150kHz_1: JP2.3 U1.17 | length 57.4
  GND w0.178: U1.17 101.6,37.592 103.505,35.687 116.047,35.687 118.185,37.825 118.185,46.534 129.055,57.404 136.144,57.404 JP2.3
150kHz_2: JP1.3 U1.16 | length 147.7
  GND w0.178: JP1.3 64.516,89.916 66.294,88.138 133.133,88.138 134.366,86.905 134.366,65.876 116.064,47.574 106.248,47.574 99.492,40.818 99.263,40.818 99.187,40.894 99.06,40.767 U1.16
+3.3: *1.9 *2.1 ICM1.1 TFT屏幕1.2 | length 123.2
  Top Layer w0.635: *2.1@74.676,103.124 74.676,103.378 *2.1@74.676,105.664
  PWR w0.635: ICM1.1 126.365,82.296 133.731,82.296 135.763,80.264 135.763,44.958 *1.9
  Bottom Layer w0.635: *2.1@74.676,103.378 88.138,89.916 96.901,89.916 ; TFT屏幕1.2 98.654,86.385 98.654,88.163 96.901,89.916 ; ICM1.1 118.745,89.916 96.901,89.916
+3.3_CAM: *2.2 摄像头1.16 | length 46.6
  Top Layer w0.635: *2.2@74.676,98.044 74.676,98.298 *2.2@74.676,100.584
  PWR w0.635: 摄像头1.16 74.168,59.182 76.454,61.468 76.454,77.089 70.866,82.677 70.866,94.488 *2.2@74.676,98.298
+5: *2.3 C1.1 JP3.4 SD卡模块1.2 U1.2 U1.4 U2.20 无线串口1.7 编码器1.2 编码器2.2 预留串口1.7 | length 233.3
  Top Layer w0.635: 无线串口1.7 63.881,93.218 74.676,93.218 *2.3@74.676,95.758 ; SD卡模块1.2 76.454,46.736 76.454,42.291 78.359,40.386 U1.2 ; v1(91.186,56.896) 91.186,58.906 C1.1 91.589,59.309 v1(93.726,59.309) ; v1(94.804,65.492) 96.375,65.492 96.393,65.475 U2.20
  PWR w0.635: 编码器2.2 55.753,100.33 59.055,97.028 无线串口1.7 61.468,85.979 61.468,79.629 59.182,77.343 预留串口1.7 59.367,77.031 59.367,76.523 62.484,73.406 62.484,58.42 65.024,55.88 68.453,55.88 69.723,54.61 69.723,51.308 71.12,49.911 SD卡模块1.2 73.533,49.911 76.581,46.863 76.581,42.037 78.232,40.386 U1.2 U1.4 ; *2.3@74.676,93.218 113.284,93.218 119.253,99.187 JP3.4@119.761,99.187
  Bottom Layer w0.635: U1.4 91.186,47.752 v1(91.186,56.896) ; v1(93.726,59.309) 93.726,64.415 v1(94.804,65.492) ; JP3.4 120.802,100.736 128.161,100.736 129.603,99.293 129.603,93.366 131.046,91.923 133.114,91.923 134.214,93.024 134.214,94.125 136.868,96.779 141.737,96.779 编码器1.2
+12: *2.5 JP1.1 JP2.1 JP4.5 JP4.7 | length 177.7
  Top Layer w0.635: *2.5@132.08,98.044 132.08,98.298 *2.5@132.08,100.584
  PWR w0.635: v1(72.771,90.17) 121.412,90.17 132.08,100.838 131.792,100.838 131.411,101.219 101.346,101.219 JP4.5 97.536,97.409 95.631,97.409 94.683,98.357 94.683,99.246 JP4.7 ; *2.5@132.08,98.298 128.524,94.742 128.524,89.662 144.018,74.168 144.018,49.276 142.138,47.396 JP2.1
  Bottom Layer w0.635: JP1.1 69.596,93.345 v1(72.771,90.17)
ADC_CV: JP4.10 U1.18 | length 122.6
  GND w0.178: JP4.10 86.868,91.186 89.611,88.443 133.259,88.443 134.671,87.031 134.671,65.75 116.191,47.269 110.267,47.269 108.483,47.269 U1.18
ADC_I: JP4.9 U1.19 | length 122.6
  GND w0.178: JP4.9 89.408,91.948 92.583,88.773 133.396,88.773 135.001,87.168 135.001,65.613 116.327,46.939 109.169,46.939 102.87,40.64 102.87,39.116 103.886,38.1 104.14,38.1 U1.19
ADC_V: JP4.8 U1.20 | length 116
  GND w0.178: JP4.8 91.948,92.71 95.504,89.154 133.554,89.154 135.382,87.326 135.382,65.455 116.485,46.558 110.141,46.558 104.14,40.557 U1.20
BEEP: *1.8 U1.43 | length 20.5
  Bottom Layer w0.178: U1.43 132.08,42.926 132.08,35.814 132.438,35.456 138.834,35.456 140.589,37.211 *1.8
DGND: *1.10 *2.6 C1.2 C2.2 CN1.1 ICM1.2 JP1.2 JP2.2 JP3.5 R1.1 SD卡模块1.1 TFT屏幕1.1 U1.1 U1.3 U2.1 U2.3 U2.5 U2.7 U2.10 U2.13 U2.15 U2.17 U2.19 摄像头1.4 摄像头1.14 无线串口1.5 无线串口1.6 编码器1.1 编码器2.1 预留串口1.5 预留串口1.6
GND: JP4.6 JP4.12 R1.2 | length 32.1
  Top Layer w1.27: JP4.12 81.904,99.441 83.682,97.663 95.366,97.663 ; JP4.6 97.028,99.325 95.366,97.663 ; R1.2 106.754,95.303 104.394,97.663 95.366,97.663
Key1: *1.5 U1.41 | length 62
  Bottom Layer w0.178: U1.41 128.397,44.069 126.619,44.069 124.587,46.101 124.587,53.467 145.669,74.549 *1.5
Key2: *1.4 U1.42 | length 59.3
  Bottom Layer w0.178: U1.42 126.873,42.926 124.079,45.72 124.079,53.467 143.129,72.517 *1.4
Key3: *1.3 U1.49 | length 37.6
  Bottom Layer w0.178: U1.49 128.524,64.262 131.318,64.262 140.589,73.533 *1.3
Key4: *1.2 U1.50 | length 30.8
  Bottom Layer w0.178: U1.50 138.049,74.295 *1.2
Key5: *1.1 U1.51 | length 29.7
  Bottom Layer w0.178: U1.51 128.397,69.723 130.81,69.723 135.509,74.422 *1.1
Key6: *1.6 U1.52 | length 33.2
  Top Layer w0.178: U1.52 129.54,68.072 135.509,62.103 *1.6
Key7: *1.7 U1.53 | length 38.7
  Top Layer w0.178: U1.53 127,70.739 128.016,69.723 129.509,69.723 138.049,61.183 *1.7
NetCN1_2: CN1.2 SW1.3 | length 10
  Top Layer w0.762: SW1.3 58.577,55.372 59.6,54.349 59.6,54.065 64.524,49.141 64.524,48.288 CN1.2
PIN1: JP3.1 U1.26 | length 84.7
  GND w0.178: U1.26 111.887,40.386 113.03,39.243 113.03,37.338 113.539,36.829 115.188,36.829 115.697,37.338 115.697,44.477 136.296,65.076 136.296,87.705 133.933,90.068 127.864,90.068 127.127,90.805 JP3.1
PIN2: JP3.2 U1.27 | length 80.2
  GND w0.178: U1.27 115.316,38.862 115.316,44.527 116.738,45.949 135.992,65.203 135.992,87.578 133.806,89.764 125.374,89.764 124.587,90.551 JP3.2
PIN3: JP3.3 U1.28 | length 79.8
  GND w0.178: U1.28 114.404,40.49 114.404,44.069 114.427,44.069 116.611,46.253 135.687,65.329 135.687,87.452 133.68,89.459 123.139,89.459 122.047,90.551 JP3.3
PWM1: JP4.1 U2.18 | length 86.5
  Top Layer w0.178: U2.18 98.933,71.501 94.996,75.438 94.996,80.01 94.488,80.518 82.423,80.518 78.461,84.48 78.461,102.233 80.233,104.005 103.055,104.005 103.063,104.013 105.156,104.013 JP4.1
PWM2: JP4.2 U2.16 | length 85.8
  Top Layer w0.178: U2.16 101.473,71.882 97.486,75.869 97.486,80.568 96.901,81.153 82.296,81.153 78.765,84.684 78.765,102.107 80.359,103.7 102.929,103.7 JP4.2
PWM3: JP4.3 U2.14 | length 85.2
  Top Layer w0.178: U2.14 104.013,71.374 100.457,74.93 100.457,81.153 99.949,81.661 82.219,81.661 79.07,84.81 79.07,101.98 80.282,103.192 100.897,103.192 JP4.3
PWM4: JP4.4 U2.12 | length 84
  Top Layer w0.178: JP4.4 102.108,99.822 99.187,102.743 80.264,102.743 79.375,101.854 79.375,84.936 82.142,82.169 101.473,82.169 103.174,80.468 103.174,75.546 106.553,72.167 U2.12
PWM5: JP4.11 U2.9 | length 77.8
  Top Layer w0.178: 79.68,101.6 79.68,85.062 82.268,82.474 101.599,82.474 ; 79.756,101.6 80.264,102.108 81.661,102.108 JP4.11 ; 101.599,82.55 103.505,82.55 105.537,80.518 105.537,75.184 109.474,71.247 109.474,61.849 106.553,58.928 U2.9
VBAT: *2.4 C2.1 SW1.2 | length 126.1
  Top Layer w0.762: SW1.2 62.739,60.072 63.182,60.515 ; C2.1 63.182,55.435 63.182,60.515 ; *2.4@132.08,92.964 132.08,95.504 131.901,95.683 130.569,95.683 129.794,96.458 129.794,101.981 126.935,104.84 78.678,104.84 76.708,102.87 76.708,90.551 63.881,77.724 63.881,61.214 63.182,60.515
pads on no net: CN1.3 CN1.4 ICM1.7 ICM1.8 M1.1 M2.1 SW1.1 U1.5 U1.6 U1.7 U1.8 U1.9 U1.10 U1.11 U1.12 U1.13 U1.14 U1.15 U1.21 U1.22 U1.23 U1.29 U1.30 U1.31 U1.32 U1.33 U1.34 U1.35 U1.36 U1.37 U1.39 U1.40 U1.44 U1.45 U1.46 U1.47 U1.48 U1.64 U1.65 U1.66 U1.70 U1.71 U1.72 U1.73 U1.74 U1.75 U1.76 U1.77 U1.82 U1.83 U1.84 U1.98 U1.107 U1.108 U1.109 U1.110 U1.111 U1.112 U1.113 U1.114 U1.115 U1.116 U1.117 U1.118 U1.119 U1.120 U1.121 U1.122 摄像头1.10 无线串口1.2 无线串口1.8 编码器1.5 编码器1.6 编码器2.5 编码器2.6 预留串口1.2 预留串口1.8

## Polygon pours and split planes (outlines as drawn)
DGND on Top Layer "DGND_L01_P000" (solid, pour order 0): 54.356,106.934 54.356,34.36 54.102,34.106 54.172,34.036 149.479,34.036 149.479,106.882 149.369,106.992
DGND on Bottom Layer "DGND_L04_P001" (solid, pour order 1): 54.102,106.992 54.102,33.909 149.369,33.909 149.369,106.992
DGND on GND "DGND_L02_P002" (solid, pour order 2): 54.229,106.934 54.229,33.909 54.356,33.782 149.479,33.782 149.479,106.807

## Keep-outs
Keep-Out Layer:
  lines w0.254: 68.89,33.909 54.102,33.909 54.102,34.303 54.102,106.992 149.369,106.992 149.369,33.909 ; 68.903,33.922 68.903,30.227 ccw(c72.903,30.227) 76.903,30.227 76.903,33.794 ; 76.903,33.909 128.842,33.909 ; 128.842,33.921 128.842,30.226 ccw(c132.842,30.226) 136.842,30.226 136.842,33.792 149.252,33.792

## Other copper
Top Layer:
  text "广东工业大学" at 133.858,105.223 h2
  text "网小宣战队" at 133.829,103.434 h2
  text "2022/5/16" at 133.704,101.774 h2

## Silkscreen, mask and mechanical layers (free items; w line width, h text height)
Top Overlay:
  lines w0.254: 43.147,41.866 44.473,37.864 ; 43.26,98.949 44.601,102.947 ; 44.219,37.864 44.727,37.863 ; 44.347,102.947 44.855,102.946 ; 44.497,50.005 44.473,37.864 ; 44.577,90.805 44.601,102.947 ; 45.814,41.861 44.473,37.864 ; 45.926,98.944 44.601,102.947 ; 72.903,29.973 72.903,30.481 ; 76.903,28.894 72.903,30.227 ; 76.903,31.561 72.903,30.227 ; 82.473,30.227 72.903,30.227 ; 123.272,30.226 132.842,30.226 ; 128.842,28.893 132.842,30.226 ; 128.842,31.559 132.842,30.226 ; 132.842,29.972 132.842,30.48
  text "65.083 (mm)" at 46.649,50.255 h4 r89.89
  text "59.939 (mm)" at 82.726,28.075 h4

## Text inside footprints (layer, text, board x,y; h text height)
*1: Top Overlay "Verson 1.0" at 139.597,78.994 h2.54 r270; Top Overlay "Owner：网小宣战队" at 139.698,67.054 h2.54 r270; Top Overlay "Designed by cyl0411" at 135.87,75.182 h2.54 r270
*2: Top Overlay "12V" at 129.125,100.517 h1; Top Overlay "VBAT" at 128.651,95.377 h1; Top Overlay "3.3V" at 76.226,105.619 h1; Top Overlay "5V" at 76.226,92.846 h1; Top Overlay "GND" at 128.758,105.546 h1; Top Overlay "GND" at 128.758,103.029 h1; Top Overlay "12V" at 129.125,98.006 h1; Top Overlay "VBAT" at 128.651,92.964 h1; Top Overlay "3.3V" at 76.226,103.06 h1; Top Overlay "3.3V_CAM" at 76.226,100.686 h1; Top Overlay "3.3V_CAM" at 76.226,98.128 h1; Top Overlay "5V" at 76.226,95.395 h1; Top Overlay "verson 1.0" at 84.328,97.439 h3; Top Overlay "owner：网小宣战队" at 97.663,97.308 h3; Top Overlay "design by cyl0411" at 84.328,94.194 h3